# Altium PCB stm32_sx1278.PcbDoc
Units mm, origin at the board's own origin, x right, y up, seen from the top; angles counter-clockwise.
Board outline 98.42 x 90.8 mm, 2 copper layers (Top Layer, Bottom Layer); 32 components, 45 nets, 169 pads, 63 vias.
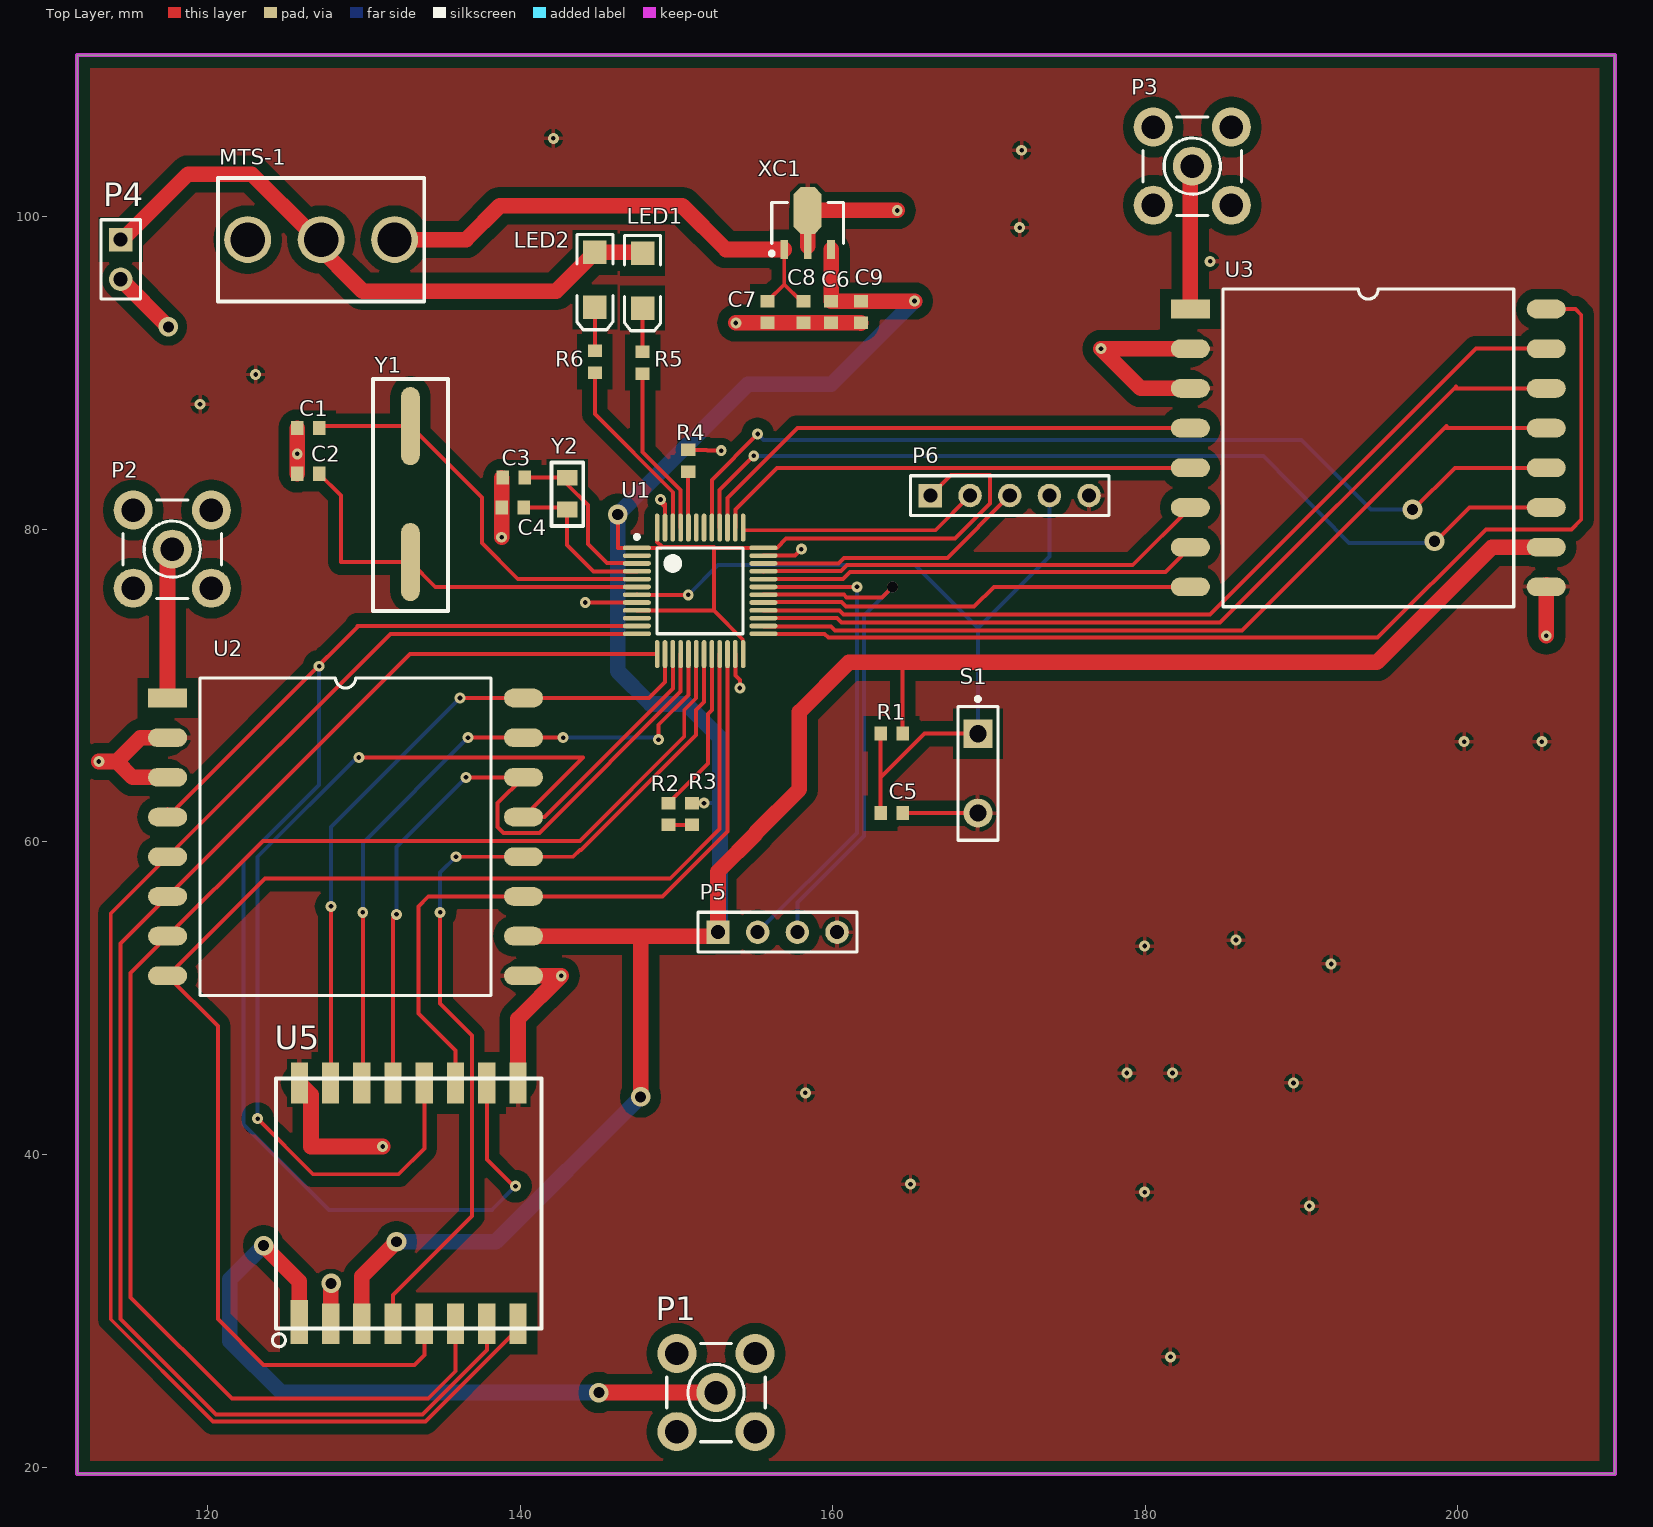
[diagram p0: Top Layer view]
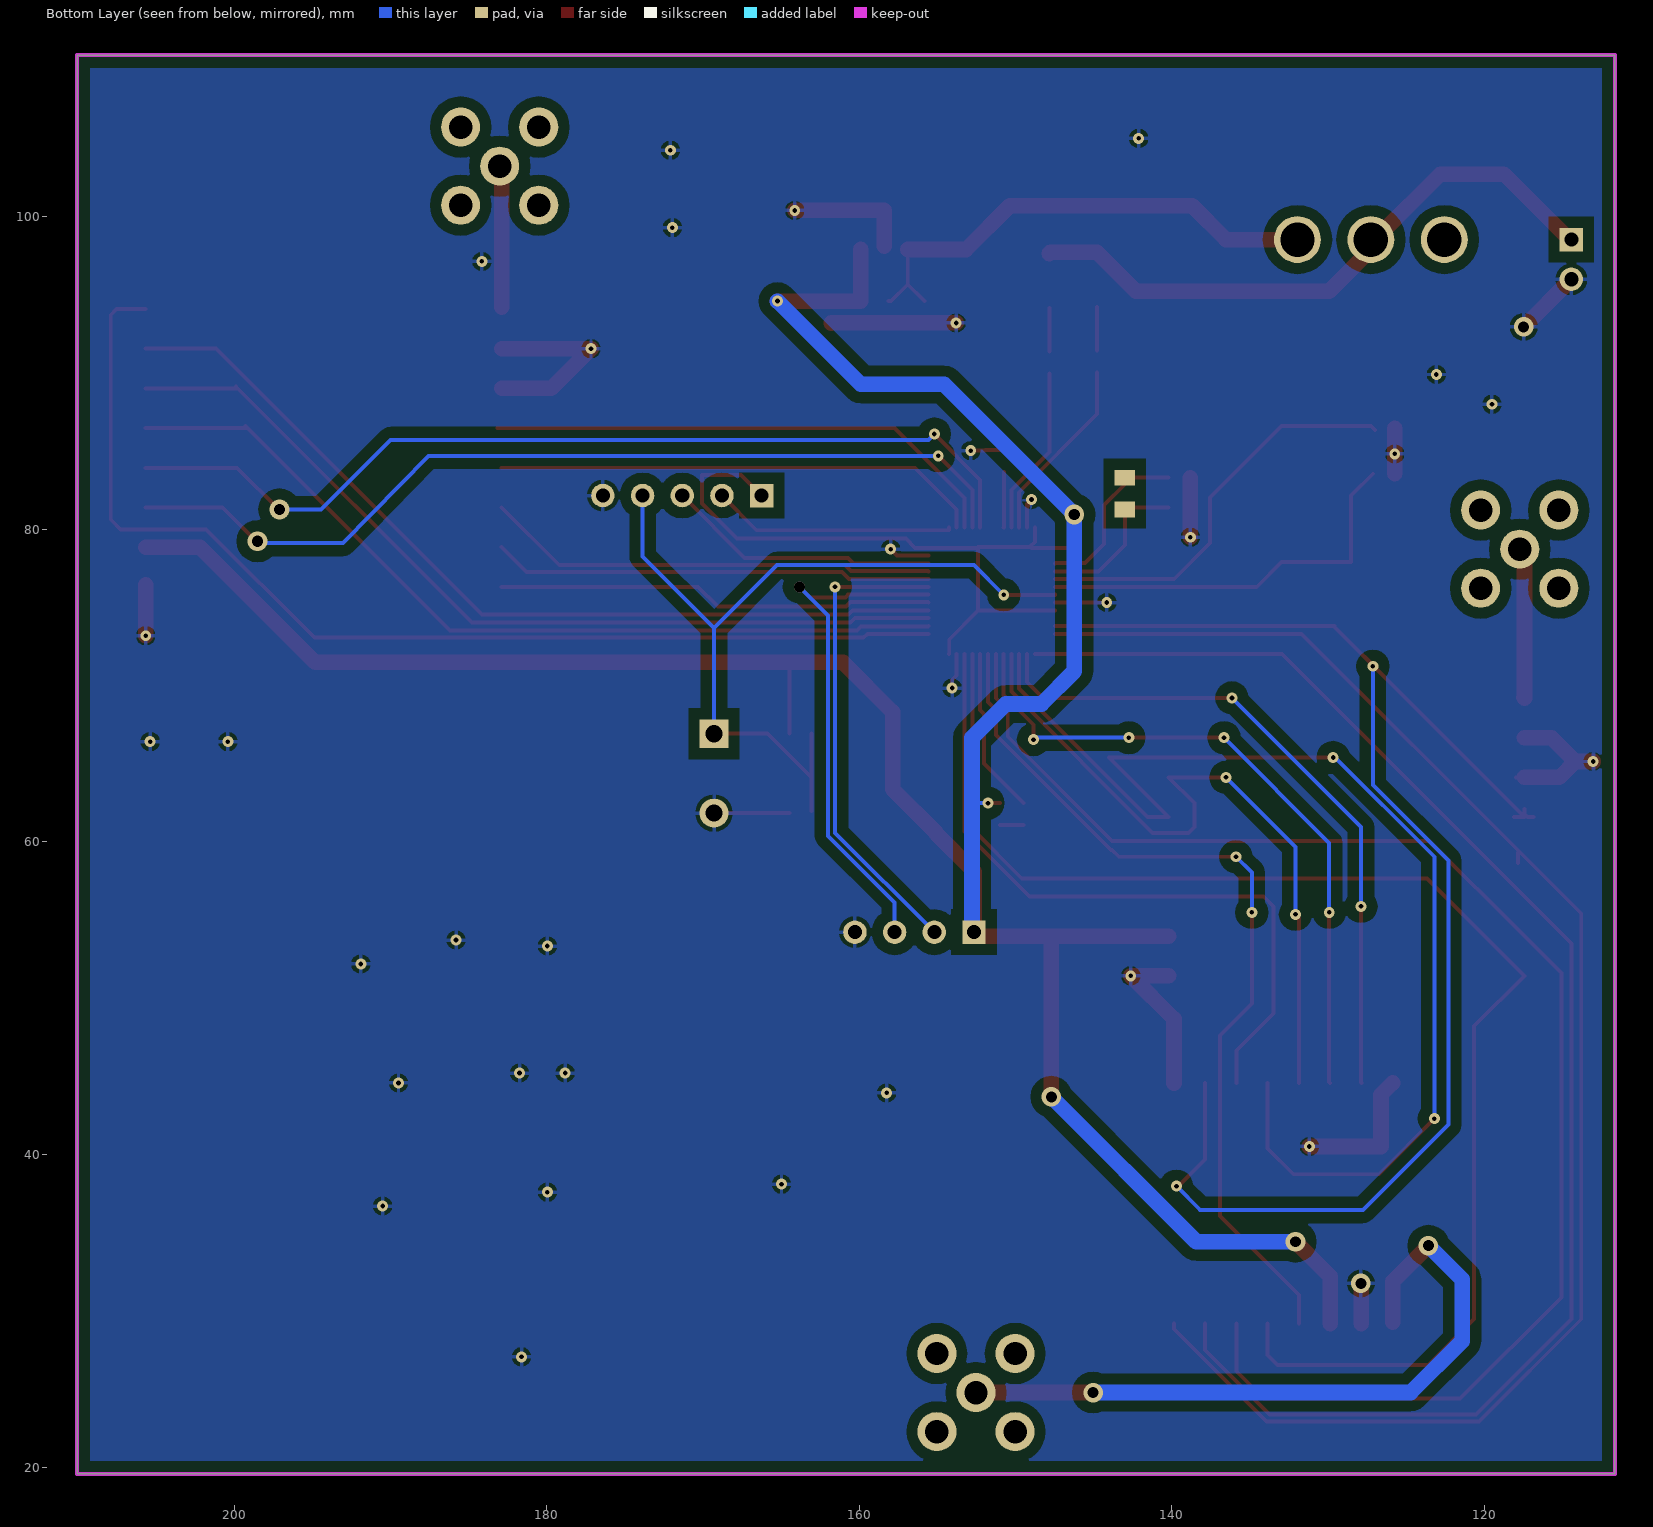
[diagram p1: Bottom Layer view, seen from below]

## Layer stack, top to bottom
Top Solder: solder mask 0.0102, Solder Resist, Dk 3.5
Top Layer: signal copper 0.0356
Dielectric 1: dielectric 0.32, FR-4, Dk 4.8
Bottom Layer: signal copper 0.0356
Bottom Solder: solder mask 0.0102, Solder Resist, Dk 3.5

## Board outline
111.633,19.558 111.633,110.363 210.058,110.363 210.058,19.558

## Design rules (kind name [scope] priority, off if disabled: settings)
Clearance [All] p1: gap=0.2 except(0.7: Arc-Poly Track-Poly SMDPad-Poly THPad-Poly Via-Poly Fill-Poly Poly-Poly)
PolygonConnect [All] p1: connectstyle=Relief reliefconductorwidth=0.254 reliefentries=4 polygonreliefangle="90 Angle" airgapwidth=0.254
RoutingVias [All] p1: holewidth=0.711 width=1.27 viastyle="Through Hole" minholewidth=0.711 minwidth=1.27 maxholewidth=0.711 maxwidth=1.27
SilkToSilkClearance [All] p1: silktosilkclearance=0.1
SilkToSolderMaskClearance [IsPad] p1: minsilkscreentomaskgap=0 clearancetoexposedcopper=TRUE
SolderMaskExpansion [All] p1: expansion=0.102
UnpouredPolygon [All] p1: allowunpoured=TRUE allowshelved=TRUE
Width [All] p1: maxlimit=2 minlimit=0.254 preferedwidth=0.254
27 further rules are at their usual default settings.

## Components (designator, comment, footprint, x,y, rotation, side; value= is the part's Value field where it differs from the comment)
C1 "Cap Semi" 1608[0603] 126.427,86.487 r0 top
C2 "Cap Semi" 1608[0603] 126.427,83.566 r0 top
C3 "Cap Semi" 1608[0603] 139.573,83.312 r0 top
C4 "Cap Semi" 1608[0603] 139.511,81.407 r0 top
C5 "Cap Semi" 1608[0603] 163.765,61.849 r0 top
C6 "Cap Semi" 1608[0603] 159.893,93.915 r90 top
C7 "Cap Semi" 1608[0603] 155.829,93.918 r90 top
C8 "Cap Semi" 1608[0603] 158.115,93.918 r90 top
C9 "Cap Semi" 1608[0603] 161.798,93.915 r90 top
LED1 "LED2" 3.2X1.6X1.1 147.828,95.913 r270 top
LED2 "LED2" 3.2X1.6X1.1 144.78,95.984 r270 top
MTS-1 "MTS-103" MTS-103 120.655,94.602 r0 top
P1 "SMB" SMB1 152.273,24.765 r0 top
P2 "SMB" SMB1 117.475,78.74 r0 top
P3 "SMB" SMB1 182.753,103.251 r0 top
P4 "Header 2" HDR1X2 114.427,98.552 r270 top
P5 "Header 4" HDR1X4 152.654,54.229 r0 top
P6 "Header 5" HDR1X5 166.243,82.169 r0 top
R1 "Res2" 1608[0603] 163.765,66.929 r180 top
R2 "Res2" 1608[0603] 149.479,61.787 r270 top
R3 "Res2" 1608[0603] 151.003,61.787 r90 top
R4 "Res2" 1608[0603] 150.749,84.393 r270 top
R5 "Res2" 1608[0603] 147.828,90.678 r270 top
R6 "Res2" 1608[0603] 144.78,90.74 r270 top
S1 "SW-PB" SPST-2 169.291,64.389 r270 top
U1 "STM32F103C8T6" LQFP48_N 151.511,76.073 r0 top
U2 "XL1276-D01" XL1278-DO1 117.428,69.215 r0 top
U3 "XL1276-D01" XL1278-DO1 182.88,94.107 r0 top
U5 "RA-01" Ra-01 132.098,27.225 r90 top
XC1 "XC6206P332MR" SOT89L 158.393,99.617 r90 top
Y1 "8M" HC-48SMD 130.569,88.614 r270 top
Y2 "32.768" FC135 142.252,83.912 r270 top

## Footprints (in the part's own frame and the unit in brackets; to place one, negate y for a bottom-side part, rotate by r counter-clockwise, add the part's x,y. Pads: shape width x height; smd on the part's side, far side on the other; paste and mask are expansions set on the pad)
3.2X1.6X1.1 [mm] "SMT LED; 2 Flat Leads"
  rect 1.5x1.5 smd: 1(-1.75,0) 2(1.75,0)
  silkscreen extent -2.9,-1.15 3.2,1.15
1608[0603] [mm] "Chip Capacitor, Body 1.6x0.8mm, IPC High Density"
  rect 0.8x0.9 smd: 1(-0.7,0) 2(0.7,0)
  body extent -0.87,-0.48 0.87,0.48, height 1.3
FC135 [mm]
  rect 1x1.3 all layers, no hole: 1(0.6,0.75) 2(2.632,0.75)
  silkscreen extent -0.38,-0.25 3.68,1.78
HC-48SMD [mm]
  oval 5x1.2 smd: 1(2,2.4) 2(10.7,2.4)
  silkscreen extent -1.02,0 13.84,4.8
HDR1X2 [mm] "Connector; Header; 2 Position"
  rect 1.5x1.5 hole 0.9: 1(0,0)
  round 1.5 hole 0.9: 2(2.54,0)
  silkscreen extent -1.27,-1.27 3.81,1.27
HDR1X4 [mm] "Connector; Header; 4 Position"
  rect 1.5x1.5 hole 0.9: 1(0,0)
  round 1.5 hole 0.9: 2(2.54,0) 3(5.08,0) 4(7.62,0)
  silkscreen extent -1.27,-1.27 8.89,1.27
HDR1X5 [mm] "Connector; Header; 5 Position"
  rect 1.5x1.5 hole 0.9: 1(0,0)
  round 1.5 hole 0.9: 2(2.54,0) 3(5.08,0) 4(7.62,0) 5(10.16,0)
  silkscreen extent -1.27,-1.27 11.43,1.27
LQFP48_N [mm] "Thin QFP, 48-Leads, Body 7x7mm, Pitch 0.5mm, IPC Medium Density"
  oval 1.8x0.3 smd: 1(-4.05,2.75) 2(-4.05,2.25) 3(-4.05,1.75) 4(-4.05,1.25) 5(-4.05,0.75) 6(-4.05,0.25) 7(-4.05,-0.25) 8(-4.05,-0.75) 9(-4.05,-1.25) 10(-4.05,-1.75) 11(-4.05,-2.25) 12(-4.05,-2.75) 25(4.05,-2.75) 26(4.05,-2.25) 27(4.05,-1.75) 28(4.05,-1.25) 29(4.05,-0.75) 30(4.05,-0.25) 31(4.05,0.25) 32(4.05,0.75) 33(4.05,1.25) 34(4.05,1.75) 35(4.05,2.25) 36(4.05,2.75)
  oval 0.3x1.8 smd: 13(-2.75,-4.05) 14(-2.25,-4.05) 15(-1.75,-4.05) 16(-1.25,-4.05) 17(-0.75,-4.05) 18(-0.25,-4.05) 19(0.25,-4.05) 20(0.75,-4.05) 21(1.25,-4.05) 22(1.75,-4.05) 23(2.25,-4.05) 24(2.75,-4.05) 37(2.75,4.05) 38(2.25,4.05) 39(1.75,4.05) 40(1.25,4.05) 41(0.75,4.05) 42(0.25,4.05) 43(-0.25,4.05) 44(-0.75,4.05) 45(-1.25,4.05) 46(-1.75,4.05) 47(-2.25,4.05) 48(-2.75,4.05)
  silkscreen extent -4.17,-2.75 2.75,3.57, body extent -3.5,-3.5 3.5,3.5, height 1.6
MTS-103 [mm]
  round 3 hole 2.2: 1(1.9,3.95) 2(6.599,3.95) 3(11.298,3.95)
  silkscreen extent 0,0 13.2,7.9
Ra-01 [mm]
  rect 2.8x1.1 smd: 1(2.052,6.24)
  rect 2.6x1.1 smd: 2(1.952,4.228) 3(1.952,2.24) 4(1.952,0.24) 5(1.952,-1.76) 6(1.952,-3.76) 7(1.952,-5.76) 8(1.952,-7.76) 9(17.352,-7.76) 10(17.352,-5.76) 11(17.352,-3.76) 12(17.352,-1.76) 13(17.352,0.24) 14(17.352,2.24) 15(17.352,4.24) 16(17.352,6.234)
  silkscreen extent 0.47,-9.26 17.65,7.96
SMB1 [mm]
  round 2.5 hole 1.5: 1(0.254,0) 2(-2.246,-2.5) 2(-2.246,2.5) 2(2.754,-2.5) 2(2.754,2.5)
  silkscreen extent -2.9,-3.15 3.4,3.15
SOT89L [mm] "SOT89, 3-Leads, Body 4.5x2.4 mm, Pitch 1.5mm, Lead Span 4.1mm, IPC High Density"
  rect 1.2x0.5 smd: 1(-1.7,1.5) 3(-1.7,-1.5)
  rect 1.6x0.5 smd: 2(-1.5,0)
  oct 3x1.8 smd: 2(0.8,0)
  silkscreen extent -2.07,-2.3 1.3,2.42, body extent -1.3,-2.3 1.3,2.3, height 1.6
SPST-2 [mm] "Switch; 2 Leads"
  rect 1.85x1.85 hole 1.1: 1(-2.54,0)
  round 1.85 hole 1.1: 2(2.54,0)
  silkscreen extent -4.89,-1.27 4.28,1.27
XL1278-DO1 [mm]
  rect 2.5x1.2 smd: 1(0,0)
  oval 2.5x1.2 smd: 2(0,-2.54) 3(0,-5.08) 4(0,-7.62) 5(0,-10.16) 6(0,-12.7) 7(0,-15.24) 8(0,-17.78) 9(22.78,-17.78) 10(22.78,-15.24) 11(22.78,-12.7) 12(22.78,-10.16) 13(22.78,-7.62) 14(22.78,-5.08) 15(22.78,-2.54) 16(22.78,0)
  silkscreen extent 2.08,-19.05 20.7,1.27

## Part data
C1 C2 C3 C4 C5 C6 C7 C8 C9: "Capacitor (Semiconductor SIM Model)"
LED1 LED2: "Typical RED, GREEN, YELLOW, AMBER GaAs LED"
P1 P2 P3: "SMB Straight Connector"
P4: "Header, 2-Pin"
P5: "Header, 4-Pin"
P6: "Header, 5-Pin"
R1 R2 R3 R4 R5 R6: "Resistor"
S1: "Switch"
U1: "STM32 ARM-based 32-bit MCU with 64 Kbytes Flash, 48-pin LQFP, Industrial Temperature"
XC1: library part "Volt Reg", "Voltage Regulator"
Y1 Y2: library part XTAL, "Crystal Oscillator"

## Via types
v1: diameter 0.7, hole 0.3, Top Layer to Bottom Layer, 53 vias
v2: diameter 1.25, hole 0.7, Top Layer to Bottom Layer, 6 vias
v3: diameter 1.27, hole 0.711, Top Layer to Bottom Layer, 3 vias
v4: diameter 0.7, hole 0.7, Top Layer to Bottom Layer, 1 vias

## Nets (pads, with @x,y where several pads share a name; then routed paths per layer and width w, separated by ;. In a path a pad name is that pad's centre, name@x,y a point inside that pad or via, vN(x,y) a via of type N, cw(c..) or ccw(c..) an arc to the next point about the centre after c; other vN are vias at no path point)
3.3V: C6.2 C9.2 P5.1 P6.1 R1.1 R3.2 U1.1 U1.9 U1.24 U1.36 U1.48 U2.10 U3.10 U5.3 XC1.3 | length 234.5
  Top Layer w0.254: v3(146.24,80.962) 146.24,78.823 U1.1 148.99,78.823 149.034,78.867 152.386,78.867 ; U1.9 152.386,74.823 ; U1.48 148.761,79.198 149.063,78.896 ; R3.2 v1(151.762,62.487) ; 152.386,78.882 152.386,78.867 ; U1.24 154.238,72.046 154.238,72.971 152.386,74.823 ; 164.338,71.501 164.465,71.374 R1.1 ; P6.1 167.567,83.493 170.053,83.493 170.053,81.661 167.809,79.417 157.014,79.417 156.42,78.823 U1.36 152.444,78.823 152.4,78.867 152.386,78.867 ; 152.386,74.823 152.386,78.867
  Top Layer w1: U5.3 129.858,32.195 v2@131.826,34.163 ; U2.10 147.955,53.975 ; v2(147.701,43.688) 147.701,53.721 147.955,53.975 ; XC1.3 C6.2 C9.2 v1(165.227,94.615) ; U3.10@205.66,78.867 202.184,78.867 194.818,71.501 164.338,71.501 161.036,71.501 157.861,68.326 157.861,63.373 155.074,60.586 155.074,60.524 152.654,58.104 P5.1 152.4,53.975 147.955,53.975
  Bottom Layer w0.254: v1(151.762,62.487) 152.778,62.487 152.781,62.484 ; v1@165.1,94.615 v1(165.227,94.615)
  Bottom Layer w1: v2(132.08,34.417) 138.43,34.417 v2(147.701,43.688) ; P5.1 152.781,54.356 152.781,62.484 152.781,66.675 150.622,68.834 148.336,68.834 146.24,70.929 v3(146.24,80.962) 154.559,89.281 159.893,89.281 v1(165.227,94.615)
+5V: LED1.1 LED2.1 MTS-1.2 P4.1 | length 39.5
  Top Layer w1: P4.1 114.554,98.552 118.745,102.743 122.809,102.743 126.619,98.933 126.619,98.552 129.921,95.25 142.296,95.25 LED2.1 147.757,97.734 LED1.1
ANT1: P3.1 U3.1 | length 9.1
  Top Layer w1: P3.1@182.753,103.251 182.88,103.124 U3.1@182.88,94.234
ANT2: P2.1 U2.1 | length 9.6
  Top Layer w1: U2.1@117.475,69.262 U2.1 117.428,78.693 P2.1@117.475,78.74
ANT3: P1.1 U5.1 | length 45.1
  Top Layer w1: v2(123.571,34.163) 125.858,31.876 U5.1 ; v2(145.034,24.765) P1.1@152.273,24.765
  Bottom Layer w1: v2(123.571,34.163) 121.412,32.004 121.412,28.067 124.714,24.765 v2(145.034,24.765)
DIO0: U1.40 U3.11 | length 59.7
  Top Layer w0.254: U1.40 152.761,82.53 v1(154.94,84.709) ; v3(198.501,79.248) 198.501,79.168 200.74,81.407 U3.11@205.66,81.407
  Bottom Layer w0.254: v1(154.94,84.709) 187.579,84.709 193.04,79.121 198.501,79.121 v3(198.501,79.248)
DIO1: U1.39 U3.4 | length 33.6
  Top Layer w0.254: U1.39 153.261,82.014 157.734,86.487 U3.4 U3.4@183.134,86.487
DIO2: U1.38 U3.5 | length 31.4
  Top Layer w0.254: U1.38 153.784,80.146 153.784,81.288 156.443,83.947 U3.5
DIO3: U1.33 U3.6 | length 29
  Top Layer w0.254: U1.33 155.584,77.346 160.524,77.346 160.902,77.724 179.197,77.724 U3.6
DIO4: U1.32 U3.7 | length 28.2
  Top Layer w0.254: U1.32 160.643,76.823 161.09,77.27 181.283,77.27 U3.7
DIO5: U1.29 U3.8 | length 28
  Top Layer w0.254: U1.29 155.584,75.346 160.545,75.346 160.834,75.057 169.037,75.057 170.307,76.327 U3.8
DIO7: U1.22 U2.11 U5.11 | length 45.4
  Top Layer w0.254: U5.11 135.858,46.641 133.477,49.022 133.477,55.88 134.112,56.515 U2.11 149.098,56.515 153.261,60.678 U1.22
DIO8: U1.11 U2.4 U5.10 | length 96.7
  Top Layer w0.254: U2.4@116.84,61.595 117.221,61.595 117.428,61.802 U2.4@117.428,62.103 ; U2.4@118.11,61.595 U2.4 v1@127.127,71.294 ; v1(127.127,71.247) v1@127.127,71.294 ; 127.635,71.827 127.127,71.319 v1@127.127,71.294 ; 129.576,73.823 U1.11 ; 129.644,73.81 v1@127.127,71.294 ; U5.10 137.858,39.688 139.573,37.973 v1(139.7,37.973)
  Bottom Layer w0.254: v1(127.127,71.247) 127.127,63.634 122.301,58.808 122.301,41.91 127.762,36.449 138.176,36.449 v1(139.7,37.973)
DIO9: U1.12 U2.5 U5.8 | length 99.2
  Top Layer w0.254: U2.5@117.833,58.651 U2.5@117.833,59.286 ; U5.8 139.858,28.846 133.926,22.914 120.335,22.914 113.792,29.457 113.792,55.419 U2.5 131.696,73.323 U1.12
DIO10: U1.13 U2.6 U5.7 | length 95.4
  Top Layer w0.254: U5.7 137.858,27.488 133.738,23.368 120.523,23.368 114.427,29.464 114.427,53.514 U2.6 132.936,72.023 U1.13
DIO11: U1.18 U2.7 U5.6 | length 95.3
  Top Layer w0.254: U5.6 135.858,26.13 134.112,24.384 121.539,24.384 115.062,30.861 115.062,51.609 U2.7 123.524,60.071 143.828,60.071 150.495,66.738 150.495,68.453 151.261,69.219 U1.18
DIO12: U1.21 U2.8 U5.5 | length 90.4
  Top Layer w0.254: U5.5 133.858,27.178 133.223,26.543 123.571,26.543 120.65,29.464 120.65,48.213 U2.8 123.651,57.658 149.599,57.658 152.761,60.82 U1.21
GND: C1.1 C2.1 C3.1 C4.1 C5.2 C6.1 C7.1 C8.1 C9.1 P4.2 P5.4 P6.5 R4.1 S1.2 U1.8 U1.23 U1.35 U1.47 U2.2 U2.3 U2.9 U3.2 U3.3 U3.9 U5.2 U5.9 U5.16 XC1.2 | length 91
  Top Layer w0.254: U2.3 U2.3@117.983,64.135 ; v1(144.157,75.323) U1.8 ; v1(148.971,81.915) 148.971,81.733 149.17,81.534 149.261,81.625 U1.47 ; R4.1 151.929,85.093 151.977,85.045 v1(152.863,85.045) ; U1.23 153.761,70.648 154.051,70.358 v1(154.051,69.85) ; U1.35 157.571,78.323 v1(157.988,78.74) ; C5.2 S1.2
  Top Layer w1: v1(113.03,65.151) 114.173,65.151 ; P4.2 v2(117.475,92.964) ; U2.3 115.189,64.135 114.173,65.151 ; U2.2 115.697,66.675 114.173,65.151 ; C2.1 v1(125.727,84.836) C1.1 ; U5.16 126.608,43.833 126.608,40.513 v1(131.191,40.513) ; U5.2 v2@127.871,31.478 ; C3.1@138.808,83.312 138.808,81.41 C4.1 v1(138.811,79.502) ; U5.9 139.858,48.672 v1(142.621,51.435) U2.9 ; v1(153.797,93.218) C7.1 C8.1 161.795,93.218 C9.1 ; XC1.2@158.393,98.117 158.393,100.417 v1(164.124,100.417) ; U3.3 179.705,89.027 v1(177.165,91.567) U3.2 ; v1(205.66,73.199) U3.9@205.66,76.454
  other v1: 181.61,27.051 190.5,36.703 179.959,37.592 164.973,38.1 158.242,43.942 189.484,44.577 178.816,45.212 181.737,45.212 191.897,52.197 179.959,53.34 185.801,53.721 200.406,66.421 205.373,66.421 119.507,88.011 123.063,89.916 184.15,97.155 171.958,99.314 172.085,104.267 142.113,105.029
  other v2: 127.889,31.75
LED1: R5.2 U1.45 | length 10.9
  Top Layer w0.254: R5.2 147.828,84.97 150.261,82.537 U1.45
LED2: R6.2 U1.46 | length 12
  Top Layer w0.254: R6.2 144.78,87.376 149.775,82.381 149.775,80.137 U1.46
NetC7_2: C7.2 C8.2 MTS-1.3 XC1.1 | length 32.4
  Top Layer w0.254: C7.2 156.893,95.682 ; XC1.1 156.893,95.682 ; C8.2 157.957,94.618 156.893,95.682
  Top Layer w1: MTS-1.3 136.525,98.552 138.684,100.711 150.368,100.711 153.162,97.917 XC1.1
NetLED1_2: LED1.2 R5.1 | length 2.8
  Top Layer w0.254: R5.1 LED1.2
NetLED2_2: LED2.2 R6.1 | length 2.8
  Top Layer w0.254: R6.1 LED2.2
NetR2_1: R2.1 U1.20 | length 10.7
  Top Layer w0.254: R2.1 152.019,65.027 152.019,68.199 152.261,68.441 U1.20
NetR2_2: R2.2 R3.1 | length 1.5
  Top Layer w0.254: R2.2 R3.1
NetR4_2: R4.2 U1.44 | length 3.6
  Top Layer w0.254: R4.2 150.749,80.135 U1.44
OSC32_IN: C3.2 U1.3 Y2.1 | length 11.2
  Top Layer w0.254: C3.2@140.208,83.312 C3.2 142.974,83.312 142.974,82.92 144.333,81.561 144.333,79.055 145.542,77.846 147.438,77.846 U1.3
OSC32_OUT: C4.2 U1.4 Y2.2 | length 10.3
  Top Layer w0.254: C4.2 142.875,81.407 Y2.2 143.002,78.994 144.673,77.323 U1.4
OSC_IN: C1.2 U1.5 Y1.1 | length 26.3
  Top Layer w0.254: C1.2@127,86.36 C1.2 127.254,86.614 Y1.1 137.541,82.042 137.541,79.121 139.839,76.823 U1.5
OSC_OUT: C2.2 U1.6 Y1.2 | length 25.8
  Top Layer w0.254: C2.2 128.524,82.169 128.524,77.914 Y1.2 134.56,76.323 U1.6
RESET: C5.1 P6.4 R1.2 S1.1 U1.7 | length 53.8
  Top Layer w0.254: U1.7 147.457,75.819 v1(150.749,75.819) ; C5.1@163.065,61.976 163.065,64.135 ; R1.2 163.065,64.135 ; S1.1 165.859,66.929 163.065,64.135
  Bottom Layer w0.254: v1(150.749,75.819) 152.654,77.724 165.27,77.724 169.291,73.703 ; S1.1 169.291,73.703 ; P6.4 173.863,78.275 169.291,73.703
RF1_REST: U1.19 U2.12 U5.4 | length 57.2
  Top Layer w0.254: U5.4 131.858,31.02 136.906,36.068 136.906,47.625 134.874,49.657 v1(134.874,55.499) ; v1(135.89,59.055) U2.12 143.383,59.055 143.818,59.49 143.889,59.49 151.257,66.858 151.257,68.453 151.761,68.957 U1.19
  Bottom Layer w0.254: v1(134.874,55.499) 134.874,58.039 v1(135.89,59.055)
RF2_REST: U1.41 U3.12 | length 60.8
  Top Layer w0.254: U1.41 152.261,83.173 v1(155.194,86.106) ; v3(197.104,81.28) 197.104,81.233 199.818,83.947 U3.12@205.66,83.947
  Bottom Layer w0.254: v1(155.194,86.106) 155.575,85.725 189.992,85.725 194.437,81.28 v3(197.104,81.28)
RX1: P5.2 U1.31 | length 30.9
  Top Layer w0.254: U1.31 155.565,76.327 v1(161.544,76.327)
  Bottom Layer w0.254: P5.2 161.544,60.579 v1(161.544,76.327) v1@161.417,76.2
SPI1_MISO: U1.16 U2.14 U5.13 | length 47
  Top Layer w0.254: U5.13 131.858,55.15 v1(132.08,55.372) ; v1(136.525,64.135) U2.14 138.557,62.484 138.557,60.957 138.935,60.579 141.224,60.579 150.261,69.616 U1.16
  Bottom Layer w0.254: v1(132.08,55.372) 132.08,59.69 v1(136.525,64.135)
SPI1_MOSI: U1.17 U2.15 U5.14 | length 43.5
  Top Layer w0.254: U5.14 129.921,44.64 v1(129.921,55.499) ; v1(136.652,66.675) U2.15 v1(142.748,66.675) ; v1(148.844,66.548) 148.844,67.501 150.761,69.418 U1.17
  Bottom Layer w0.254: v1(129.921,55.499) 129.921,59.944 v1(136.652,66.675) ; v1(142.748,66.675) 148.844,66.675 v1(148.844,66.548)
SPI1_NSS: U1.14 U2.16 U5.15 | length 43.1
  Top Layer w0.254: U5.15 127.889,44.608 v1(127.889,55.88) ; v1(136.144,69.215) U2.16 148.245,69.215 149.261,70.231 U1.14
  Bottom Layer w0.254: v1@127.889,56.134 127.889,60.96 v1(136.144,69.215)
SPI1_SCK: U1.15 U2.13 U5.12 | length 78
  Top Layer w0.254: v1(123.19,42.291) 126.746,38.735 132.207,38.735 133.858,40.386 U5.12 ; v1(129.667,65.405) 144.018,65.405 U2.13 141.541,61.595 149.761,69.815 U1.15
  Bottom Layer w0.254: v1(123.19,42.291) 123.19,59.055 129.667,65.532 v1(129.667,65.405)
SPI2_MISO: U1.27 U3.14 | length 56.5
  Top Layer w0.254: U1.27 160.283,74.323 160.565,74.041 184.785,74.041 199.898,89.154 ; 199.898,89.027 U3.14@205.66,89.027
SPI2_MOSI: U1.28 U3.15 | length 57.3
  Top Layer w0.254: U1.28 160.425,74.823 160.699,74.549 184.15,74.549 201.168,91.567 U3.15@205.66,91.567
SPI2_NSS: U1.25 U3.16 | length 71.1
  Top Layer w0.254: U1.25 159.468,73.323 159.712,73.079 194.872,73.079 201.803,80.01 207.264,80.01 207.899,80.645 207.899,93.726 207.518,94.107 U3.16@205.66,94.107
SPI2_SCK: U1.26 U3.13 | length 55.6
  Top Layer w0.254: U1.26 155.584,73.8 159.88,73.8 160.147,73.533 186.182,73.533 199.263,86.614 ; 199.263,86.487 U3.13@205.66,86.487
SWCLK: P6.2 U1.37 | length 15.6
  Top Layer w0.254: U1.37 154.261,79.949 166.563,79.949 P6.2
SWDIO: P6.3 U1.34 | length 17.6
  Top Layer w0.254: U1.34 160.359,77.823 160.714,78.178 167.332,78.178 P6.3
TX1: P5.3 U1.30 | length 33.2
  Top Layer w0.254: U1.30 160.71,75.823 160.883,75.65 163.153,75.65 v4(163.83,76.327)
  Bottom Layer w0.254: P5.3 157.734,56.127 161.998,60.391 161.998,74.495 v4(163.83,76.327)
pads on no net: MTS-1.1 P1.2 P2.2 P3.2 U1.2 U1.10 U1.42 U1.43

## Polygon pours and split planes (outlines as drawn)
GND on Bottom Layer "Bottom Layer-No Net" (solid, remove dead copper, pour order 4): 111.633,110.109 210.058,110.109 210.058,20.066 111.633,20.066
GND on Top Layer "Bottom Layer-No Net" (solid, remove dead copper, pour order 6): 111.633,110.363 111.887,110.109 209.042,110.109 209.042,19.939 208.915,19.812 208.661,20.066 111.633,20.066

## Keep-outs
Keep-Out Layer:
  the board outline again, w0.254

## Silkscreen, mask and mechanical layers (free items; w line width, h text height)
Mechanical 1:
  circle w0.254: c204.978,105.918 r3
  circle w0.254: c204.978,25.908 r3

## Dimensions
210.058,110.363 to 210.312,19.939 on Mechanical 1
111.633,110.871 to 210.058,110.363 on Mechanical 1